# EAGLE board talos (EAGLE 9.6.2)
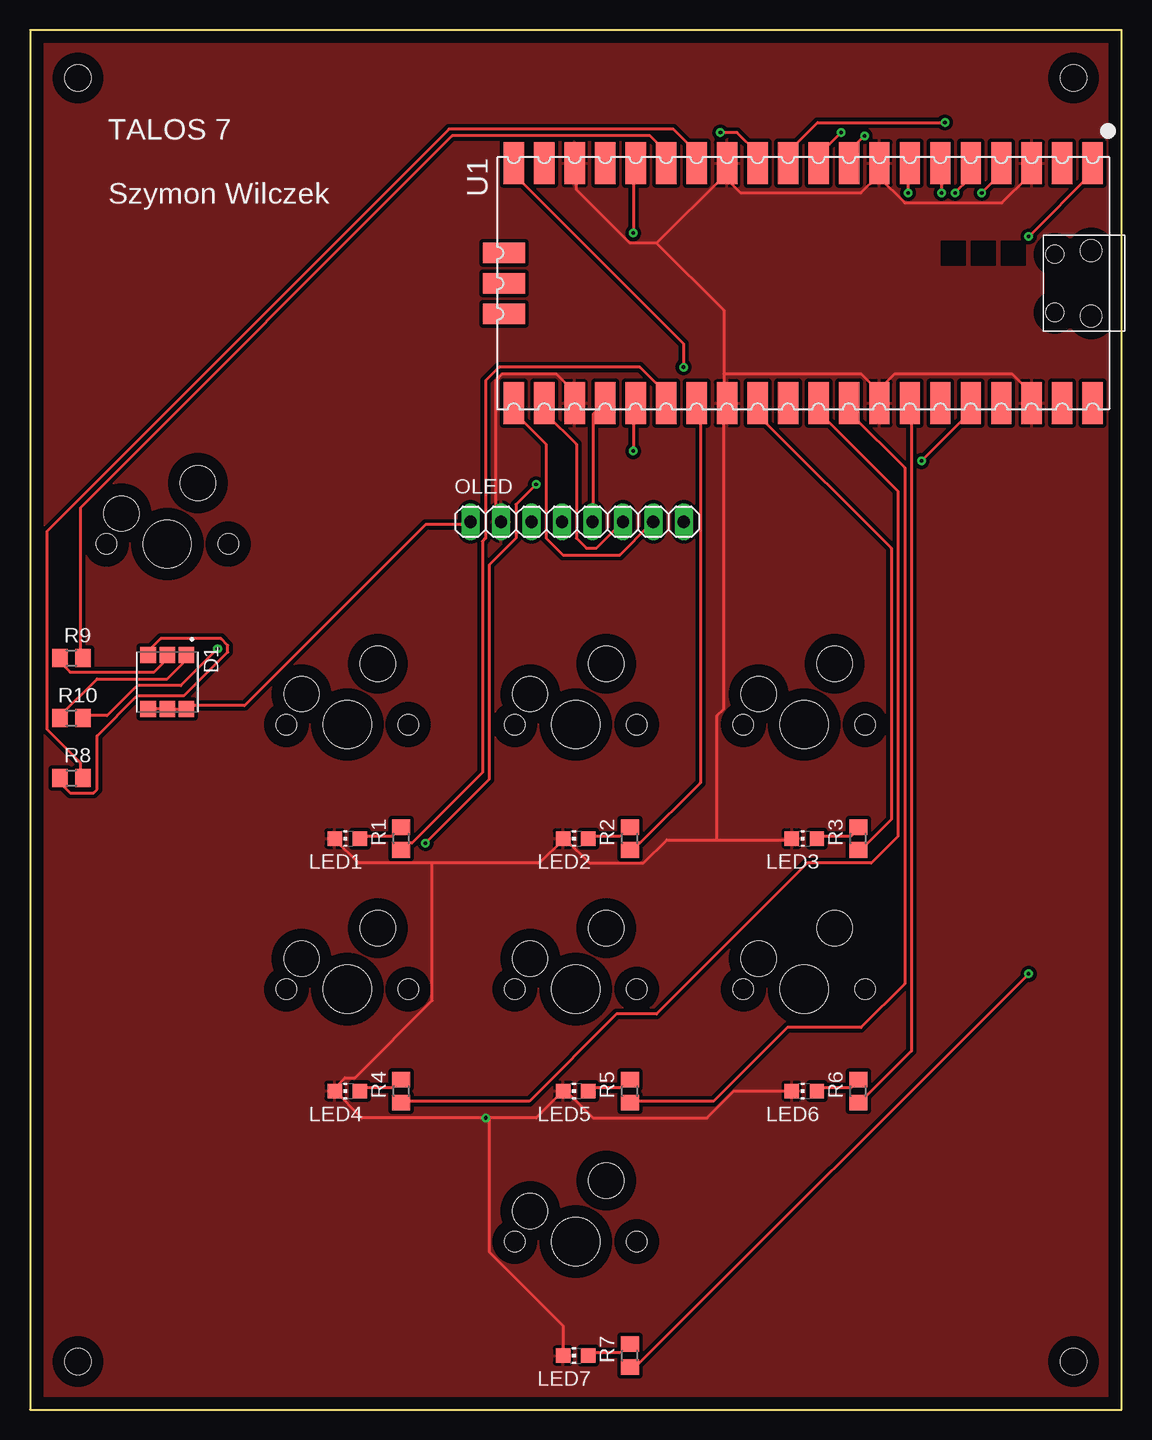
[diagram p0: board, top side]
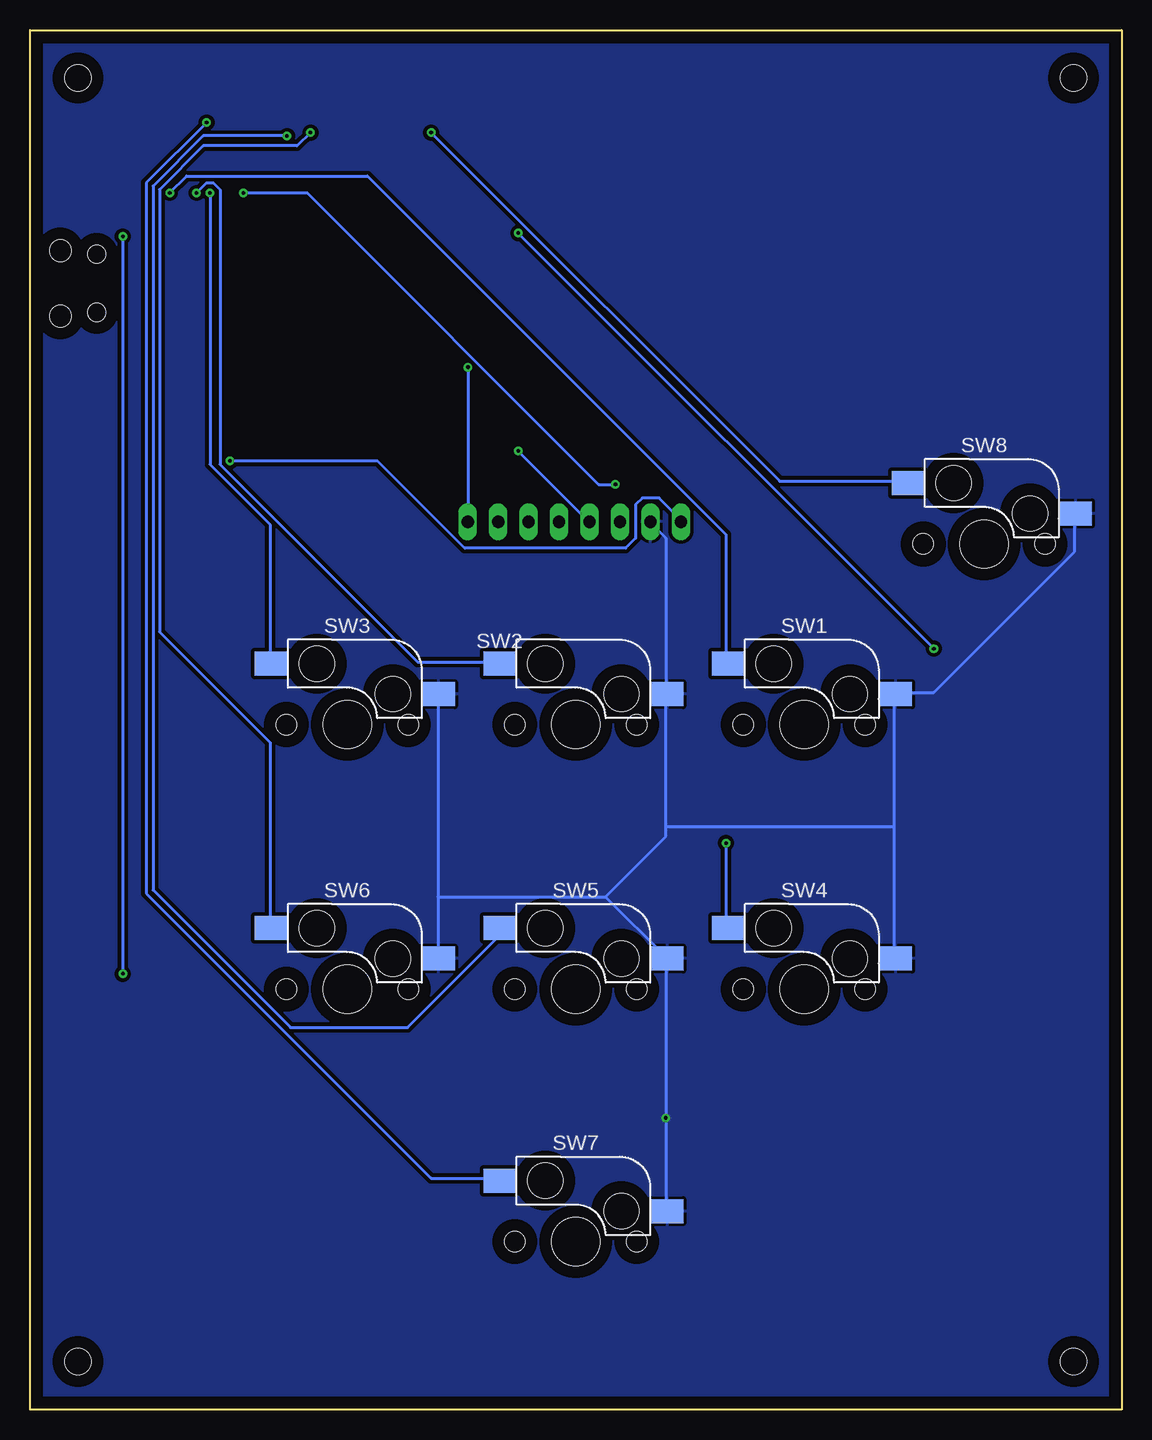
[diagram p1: board, bottom side, seen from below]

Size 91 x 115 mm. Coordinates in mm from the lower left corner, seen from the top.
Outline: 0,0 91,0 91,115 0,115 0,0
Copper layers (1*16): Top 0.035mm / dielectric 1.6mm / Bottom 0.035mm
Design rules "default *": minimum track width 10mil, minimum drill 12mil, track to track 12mil, track to pad 12mil, pad to pad 12mil, via to via 12mil, smd to smd 10mil, copper to edge 40mil, drill to drill 6mil, minimum pad ring 10mil, minimum via ring 8mil, stop-mask expansion 4mil, vias tented up to drill 0mil, thermal gap 10mil
Holes 2.2 mm at 4,111 87,111 87,4 4,4

## Footprints (pad centres in the part's own frame; a part is rotated, then mirrored left to right if it is on the bottom)
LED_LTST-G563ZEGBW = smd 1.3 x 1.3: 1 -2.25,1.6; 2 -2.25,0; 3 -2.25,-1.6; 4 2.25,-1.6; 5 2.25,0; 6 2.25,1.6
CHIP-LED0805 = smd 1.2 x 1.2: A 0,-1.05; C 0,1.05
1X08 = drill 1.016 long: 1 -8.89,0; 2 -6.35,0; 3 -3.81,0; 4 -1.27,0; 5 1.27,0; 6 3.81,0; 7 6.35,0; 8 8.89,0
R0805 = smd 1.3 x 1.5: 1 -0.95,0; 2 0.95,0
SWITCH_SOCKET = smd 2.7 x 2 bottom: 1 6.355,5.08; 2 -7.625,2.54 | hole 4: 0,0 | hole 2.93: -3.81,2.54; 2.54,5.08 | hole 1.7: -5.08,0; 5.08,0
PICO-PKG-SMD = smd 3.5 x 1.7: P$1 -10,24.13; P$2 -10,21.59; P$3 -10,19.05; P$4 -10,16.51; P$5 -10,13.97; P$6 -10,11.43; P$7 -10,8.89; P$8 -10,6.35; P$9 -10,3.81; P$10 -10,1.27; P$11 -10,-1.27; P$12 -10,-3.81; P$13 -10,-6.35; P$14 -10,-8.89; P$15 -10,-11.43; P$16 -10,-13.97; P$17 -10,-16.51; P$18 -10,-19.05; P$19 -10,-21.59; P$20 -10,-24.13; P$21 10,-24.13; P$22 10,-21.59; P$23 10,-19.05; P$24 10,-16.51; P$25 10,-13.97; P$26 10,-11.43; P$27 10,-8.89; P$28 10,-6.35; P$29 10,-3.81; P$30 10,-1.27; P$31 10,1.27; P$32 10,3.81; P$33 10,6.35; P$34 10,8.89; P$35 10,11.43; P$36 10,13.97; P$37 10,16.51; P$38 10,19.05; P$39 10,21.59; P$40 10,24.13 | smd 1.7 x 3.5: P$41 -2.54,-24.925; P$42 0,-24.925; P$43 2.54,-24.925 | hole 1.8: -2.725,24; 2.725,24 | hole 1.5: -2.425,20.97; 2.425,20.97

## Placement (x,y rotation side)
D1  LTST-G563ZEGBW  [LED_LTST-G563ZEGBW]  11.45,60.65 270 top
LED1  BLUE  [CHIP-LED0805]  26.45,47.6 90 top
LED2  BLUE  [CHIP-LED0805]  45.5,47.6 90 top
LED3  BLUE  [CHIP-LED0805]  64.55,47.6 90 top
LED4  BLUE  [CHIP-LED0805]  26.45,26.55 90 top
LED5  BLUE  [CHIP-LED0805]  45.5,26.55 90 top
LED6  BLUE  [CHIP-LED0805]  64.55,26.55 90 top
LED7  BLUE  [CHIP-LED0805]  45.5,4.5 90 top
OLED  SSD106_SPI  [1X08]  45.62,74 0 top
R1  220R  [R0805]  30.95,47.6 90 top
R2  220R  [R0805]  50,47.6 90 top
R3  220R  [R0805]  69.05,47.6 90 top
R4  220R  [R0805]  30.95,26.55 90 top
R5  220R  [R0805]  50,26.55 90 top
R6  220R  [R0805]  69.05,26.55 90 top
R7  220R  [R0805]  50,4.5 90 top
R8  330R  [R0805]  3.45,52.65 0 top
R9  220R  [R0805]  3.45,62.65 0 top
R10  220R  [R0805]  3.45,57.65 0 top
SW1  KAILH_SWITCH_SOCKET  [SWITCH_SOCKET]  26.45,57.1 0 top
SW2  KAILH_SWITCH_SOCKET  [SWITCH_SOCKET]  45.5,57.1 0 top
SW3  KAILH_SWITCH_SOCKET  [SWITCH_SOCKET]  64.55,57.1 0 top
SW4  KAILH_SWITCH_SOCKET  [SWITCH_SOCKET]  26.45,35.05 0 top
SW5  KAILH_SWITCH_SOCKET  [SWITCH_SOCKET]  45.5,35.05 0 top
SW6  KAILH_SWITCH_SOCKET  [SWITCH_SOCKET]  64.55,35.05 0 top
SW7  KAILH_SWITCH_SOCKET  [SWITCH_SOCKET]  45.5,14 0 top
SW8  KAILH_SWITCH_SOCKET  [SWITCH_SOCKET]  11.45,72.15 0 top
U1  RASPBERRY_PICOSMD  [PICO-PKG-SMD]  64.47,93.88 270 top

## Library data of the parts
D1 = LTST-G563ZEGBW; AVAILABILITY: In Stock; CHECK_PRICES: https://www.snapeda.com/parts/LTST-G563ZEGBW/Lite-On/view-part/?ref=eda; DESCRIPTION: LED; SMD; 5050, PLCC6; RGB; 5x5x1.6mm; 120°; 20mA; Lens: transparent; MF: Lite-On; MP: LTST-G563ZEGBW; PACKAGE: PLCC-6 Lite-On; PRICE: None; SNAPEDA_LINK: https://www.snapeda.com/parts/LTST-G563ZEGBW/Lite-On/view-part/?ref=snap
LED1-LED7 = led
OLED = pinhead
R1-R10 = rcl; SPICEPREFIX: R
SW1-SW8 = Kailh_switch_socket
U1 = RpiPico

## Nets
BTN1: SW1.1 U1.P$4
BTN2: SW2.1 U1.P$5
BTN3: SW3.1 U1.P$6
BTN4: SW4.1 U1.P$7
BTN5: SW5.1 U1.P$9
BTN6: SW6.1 U1.P$10
BTN7: SW7.1 U1.P$11
BTN_OS: SW8.1 U1.P$12
GND: LED1.C LED2.C LED3.C LED4.C LED5.C LED6.C LED7.C OLED.2 SW1.2 SW2.2 SW3.2 SW4.2 SW5.2 SW6.2 SW7.2 SW8.2 U1.P$3 U1.P$8 U1.P$13 U1.P$18 U1.P$23 U1.P$28 U1.P$33 U1.P$38
LED1: R1.1 U1.P$26
LED2: R2.1 U1.P$27
LED3: R3.1 U1.P$29
LED4: R4.1 U1.P$31
LED5: R5.1 U1.P$32
LED6: R6.1 U1.P$34
LED7: R7.1 U1.P$1
LED_B: R10.2 U1.P$16
LED_G: R9.2 U1.P$15
LED_R: R8.2 U1.P$14
N$1: LED1.A R1.2
N$2: LED2.A R2.2
N$3: LED3.A R3.2
N$4: LED4.A R4.2
N$5: LED5.A R5.2
N$6: LED6.A R6.2
N$7: D1.3 R8.1
N$8: LED7.A R7.2
N$9: D1.1 R10.1
N$10: D1.2 R9.1
OLED_CLK: OLED.5 U1.P$24
OLED_CS: OLED.6 U1.P$22
OLED_DC: OLED.7 U1.P$21
OLED_DIN: OLED.4 U1.P$25
OLED_RES: OLED.8 U1.P$20
SWGND: U1.P$42
VBUS: U1.P$40
VCC: U1.P$39
VCC_OUT: D1.4 D1.5 D1.6 OLED.1 U1.P$36

## Tracks (layer width: path | path; a pad name or v marks a point on that pad's centre or on a via)
BTN1  (via drill 0.3)
  Top 0.254: v79.35,101.42 80.75,102.82 80.75,103.66 U1.P$4
  Bottom 0.254: v79.35,101.42 77.95,102.82 62.87,102.82 32.97,72.92 32.97,62.31 SW1.1
BTN2  (via drill 0.3)
  Top 0.254: v77.11,101.42 78.23,102.54 78.23,103.66 U1.P$5
  Bottom 0.254: v77.11,101.42 76.28,102.26 75.72,102.26 75.16,101.7 75.16,78.79 58.67,62.31 51.97,62.31 SW2.1
BTN3  (via drill 0.3)
  Top 0.254: v76,101.42 76,103.66 U1.P$6
  Bottom 0.254: v76,101.42 76,78.79 70.97,73.76 70.97,62.31 SW3.1
BTN4  (via drill 0.3)
  Top 0.254: v32.97,47.22 38.28,52.53 38.28,70.41 40.51,72.64 40.51,75.44 v42.19,77.11 | v73.2,101.42 73.2,103.66 U1.P$7
  Bottom 0.254: v32.97,47.22 32.97,40.23 SW4.1 | v42.19,77.11 43.59,77.11 67.89,101.42 v73.2,101.42
BTN5  (via drill 0.3)
  Top 0.254: v69.57,106.17 68.45,105.05 68.45,103.94 U1.P$9
  Bottom 0.254: v69.57,106.17 76.56,106.17 80.75,101.98 80.75,43.31 69.29,31.85 59.51,31.85 51.97,39.4 51.97,39.95 SW5.1
BTN6  (via drill 0.3)
  Top 0.254: v67.61,106.45 65.94,104.78 65.94,103.94 U1.P$10
  Bottom 0.254: v67.61,106.45 68.73,105.33 76.56,105.33 80.19,101.7 80.19,64.82 70.97,55.6 70.97,40.23 SW6.1
BTN7  (via drill 0.3)
  Top 0.254: v76.28,107.29 65.66,107.29 63.42,105.05 63.42,103.94 U1.P$11
  Bottom 0.254: v76.28,107.29 81.31,102.26 81.31,43.03 57.56,19.28 51.97,19.28 SW7.1
BTN_OS  (via drill 0.3)
  Top 0.254: v57.56,106.45 58.95,106.45 60.63,104.78 60.63,103.94 U1.P$12
  Bottom 0.254: v57.56,106.45 28.5,77.39 17.88,77.39 SW8.1
GND  (via drill 0.3)
  Top 0.254: U1.P$23 45.26,84.1 45.26,84.94 43.87,86.33 39.4,86.33 38.84,85.78 38.84,74.32 39.12,74.04 OLED.2 | 52.25,97.23 50.01,97.23 45.54,101.7 45.54,103.66 U1.P$18 | 57.84,102.82 52.25,97.23 | 57.84,102.82 57.84,103.66 U1.P$13 57.84,102.82 | 57.84,86.33 57.84,91.64 52.25,97.23 | 57.84,86.33 57.84,84.1 U1.P$28 57.84,83.82 57.84,58.4 57.28,57.84 57.28,47.5 | 70.69,84.94 70.69,84.1 U1.P$33 70.69,84.94 | 70.69,84.94 69.29,86.33 57.84,86.33 | 70.69,102.82 70.69,103.66 U1.P$8 70.69,102.82 | 70.69,102.82 69.29,101.42 59.23,101.42 57.84,102.82 | 70.69,84.94 72.08,86.33 81.86,86.33 83.26,84.94 83.26,84.1 U1.P$38 | 70.69,102.82 72.92,100.58 81.03,100.58 83.26,102.82 83.26,103.66 U1.P$3 | 33.53,45.54 42.47,45.54 44.42,47.5 LED2.C 44.7,47.5 46.66,45.54 51.13,45.54 53.09,47.5 57.28,47.5 | 33.53,45.54 27.38,45.54 25.43,47.5 LED1.C | 57.28,47.5 63.42,47.5 LED3.C | 38.28,24.31 42.19,24.31 44.42,26.54 LED5.C 44.7,26.54 46.94,24.31 56.44,24.31 58.67,26.54 63.42,26.54 LED6.C | 38.28,24.31 v38,24.31 27.66,24.31 25.43,26.54 LED4.C 25.43,26.82 26.26,27.66 27.1,27.66 33.53,34.09 33.53,45.54 | 38.28,24.31 38.28,13.13 44.42,6.99 44.42,4.75 LED7.C
  Bottom 0.254: 19,48.62 19,59.51 SW1.2 18.72,59.79 15.65,59.79 3.91,71.53 3.91,74.6 SW8.2 | 19,48.62 19,37.72 SW4.2 | OLED.2 39.12,73.76 38,72.64 38,59.79 SW2.2 38,59.51 38,48.62 | SW7.2 38,16.76 v38,24.31 38,37.44 SW5.2 38,37.72 43.03,42.75 | 57,42.75 57,59.51 SW3.2 | 57,42.75 57,37.72 SW6.2 | 57,42.75 43.03,42.75 | 38,48.62 38,47.78 43.03,42.75 | 38,48.62 19,48.62
  pour Top: -1,116 92,116 92,-1 91.5,-1.5 -1,-1.5
  pour Bottom: -0.5,115.5 91.5,115.5 91.5,-0.5 91,-1 -0.5,-1
LED1
  Top 0.254: R1.1 31.01,46.66 31.57,47.22 31.85,47.22 37.72,53.09 37.72,72.36 38,72.64 38,85.78 39.12,86.89 50.85,86.89 52.81,84.94 52.81,84.1 U1.P$26
LED2
  Top 0.254: R2.1 50.01,46.66 50.57,47.22 50.85,47.22 55.88,52.25 55.88,83.54 55.6,83.82 U1.P$27
LED3
  Top 0.254: R3.1 69.29,46.66 71.81,49.17 71.81,71.81 60.91,82.7 60.91,83.82 U1.P$29
LED4
  Top 0.254: R4.1 31.01,25.7 41.63,25.7 48.9,32.97 52.25,32.97 64.82,45.54 70.13,45.54 72.36,47.78 72.36,76.56 65.94,82.98 65.94,83.82 U1.P$31
LED5
  Top 0.254: R5.1 50.01,25.7 57,25.7 63.14,31.85 69.29,31.85 72.92,35.48 72.92,78.51 68.45,82.98 68.45,83.82 U1.P$32
LED6
  Top 0.254: R6.1 69.29,25.7 73.48,29.9 73.48,83.82 U1.P$34
LED7  (via drill 0.3)
  Top 0.254: v83.26,36.32 50.57,3.63 50.01,3.63 R7.1 | v83.26,97.79 88.57,103.1 88.57,103.66 U1.P$1
  Bottom 0.254: v83.26,97.79 v83.26,36.32
LED_B  (via drill 0.3)
  Top 0.254: v15.65,63.42 12.57,60.35 8.94,60.35 6.43,57.84 4.47,57.84 R10.2 | v50.29,98.07 50.29,103.66 U1.P$16
  Bottom 0.254: v50.29,98.07 v15.65,63.42
LED_G
  Top 0.254: R9.2 4.19,62.87 4.19,75.16 35.2,106.17 51.69,106.17 52.81,105.05 52.81,103.94 U1.P$15
LED_R
  Top 0.254: R8.2 4.19,52.81 4.19,53.92 1.4,56.72 1.4,73.2 34.92,106.73 53.65,106.73 55.32,105.05 55.32,103.94 U1.P$14
N$1
  Top 0.254: LED1.A 27.66,47.78 30.18,47.78 30.73,48.34 R1.2
N$2
  Top 0.254: LED2.A 46.66,47.78 49.17,47.78 49.73,48.34 R2.2
N$3
  Top 0.254: LED3.A 65.66,47.78 68.45,47.78 69.01,48.34 R3.2
N$4
  Top 0.254: LED4.A 27.66,26.82 30.18,26.82 30.73,27.38 R4.2
N$5
  Top 0.254: LED5.A 46.66,26.82 49.17,26.82 49.73,27.38 R5.2
N$6
  Top 0.254: LED6.A 65.66,26.82 68.45,26.82 69.01,27.38 R6.2
N$7
  Top 0.254: D1.3 10.06,63.14 10.06,63.42 10.9,64.26 15.93,64.26 16.48,63.7 16.48,63.14 12.85,59.51 8.94,59.51 5.59,56.16 5.59,51.69 5.31,51.41 3.35,51.41 2.23,52.53 R8.1
N$8
  Top 0.254: LED7.A 46.66,4.75 49.17,4.75 49.73,5.31 R7.2
N$9
  Top 0.254: D1.1 12.85,62.87 12.85,62.31 11.46,60.91 5.59,60.91 2.52,57.84 R10.1
N$10
  Top 0.254: D1.2 11.18,62.87 11.18,62.31 10.34,61.47 3.35,61.47 2.23,62.59 R9.1
OLED_CLK
  Top 0.254: OLED.5 46.94,74.04 46.94,82.98 47.78,83.82 U1.P$24
OLED_CS
  Top 0.254: OLED.6 49.17,73.76 47.22,71.81 46.38,71.81 45.54,72.64 45.54,80.47 43.03,82.98 43.03,83.82 U1.P$22
OLED_DC
  Top 0.254: OLED.7 51.69,73.76 49.17,71.25 44.42,71.25 43.03,72.64 43.03,80.47 40.51,82.98 40.51,83.82 U1.P$21
OLED_DIN  (via drill 0.3)
  Top 0.254: v50.29,79.91 50.29,83.82 U1.P$25
  Bottom 0.254: v50.29,79.91 44.42,74.04 OLED.4
OLED_RES  (via drill 0.3)
  Top 0.254: v54.48,86.89 54.48,88.85 40.51,102.82 40.51,103.66 U1.P$20
  Bottom 0.254: v54.48,86.89 54.48,74.04 OLED.8
VCC_OUT  (via drill 0.3)
  Top 0.254: D1.4 10.06,58.4 11.18,58.4 D1.5 12.85,58.4 D1.6 13.13,58.67 17.88,58.67 32.97,73.76 36.6,73.76 OLED.1 | v74.32,79.07 78.23,82.98 78.23,83.82 U1.P$36
  Bottom 0.254: v74.32,79.07 62.03,79.07 54.76,71.81 41.35,71.81 40.51,72.64 40.51,75.44 39.95,76 38.56,76 36.6,74.04 OLED.1

## Text on the board
tPlace: TALOS 7 / / Szymon Wilczek